# Altium PCB digital_measurer.PcbDoc
Units mm, origin at the board's own origin, x right, y up, seen from the top; angles counter-clockwise.
Board outline 26.48 x 31.15 mm, 2 copper layers (Top Layer, Bottom Layer); 25 components, 15 nets, 93 pads, 20 vias.
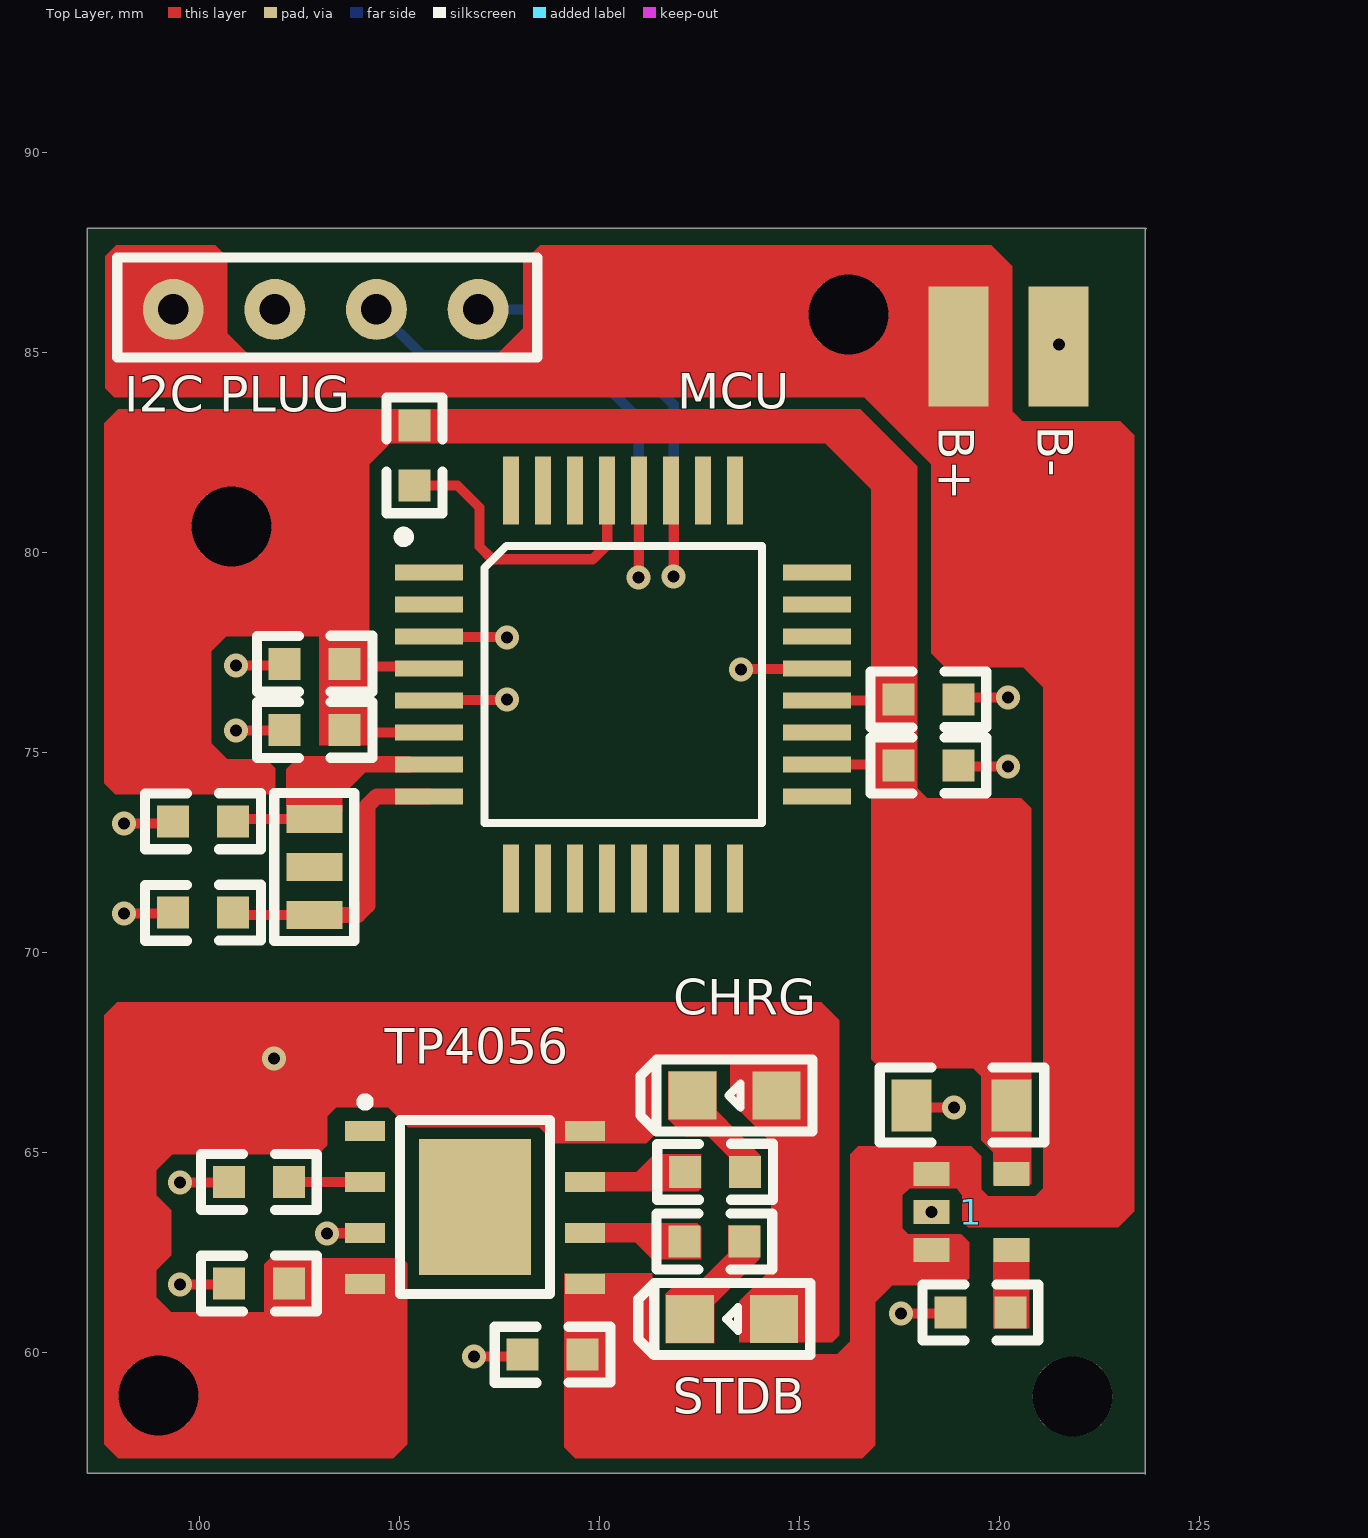
[diagram p0: Top Layer view]
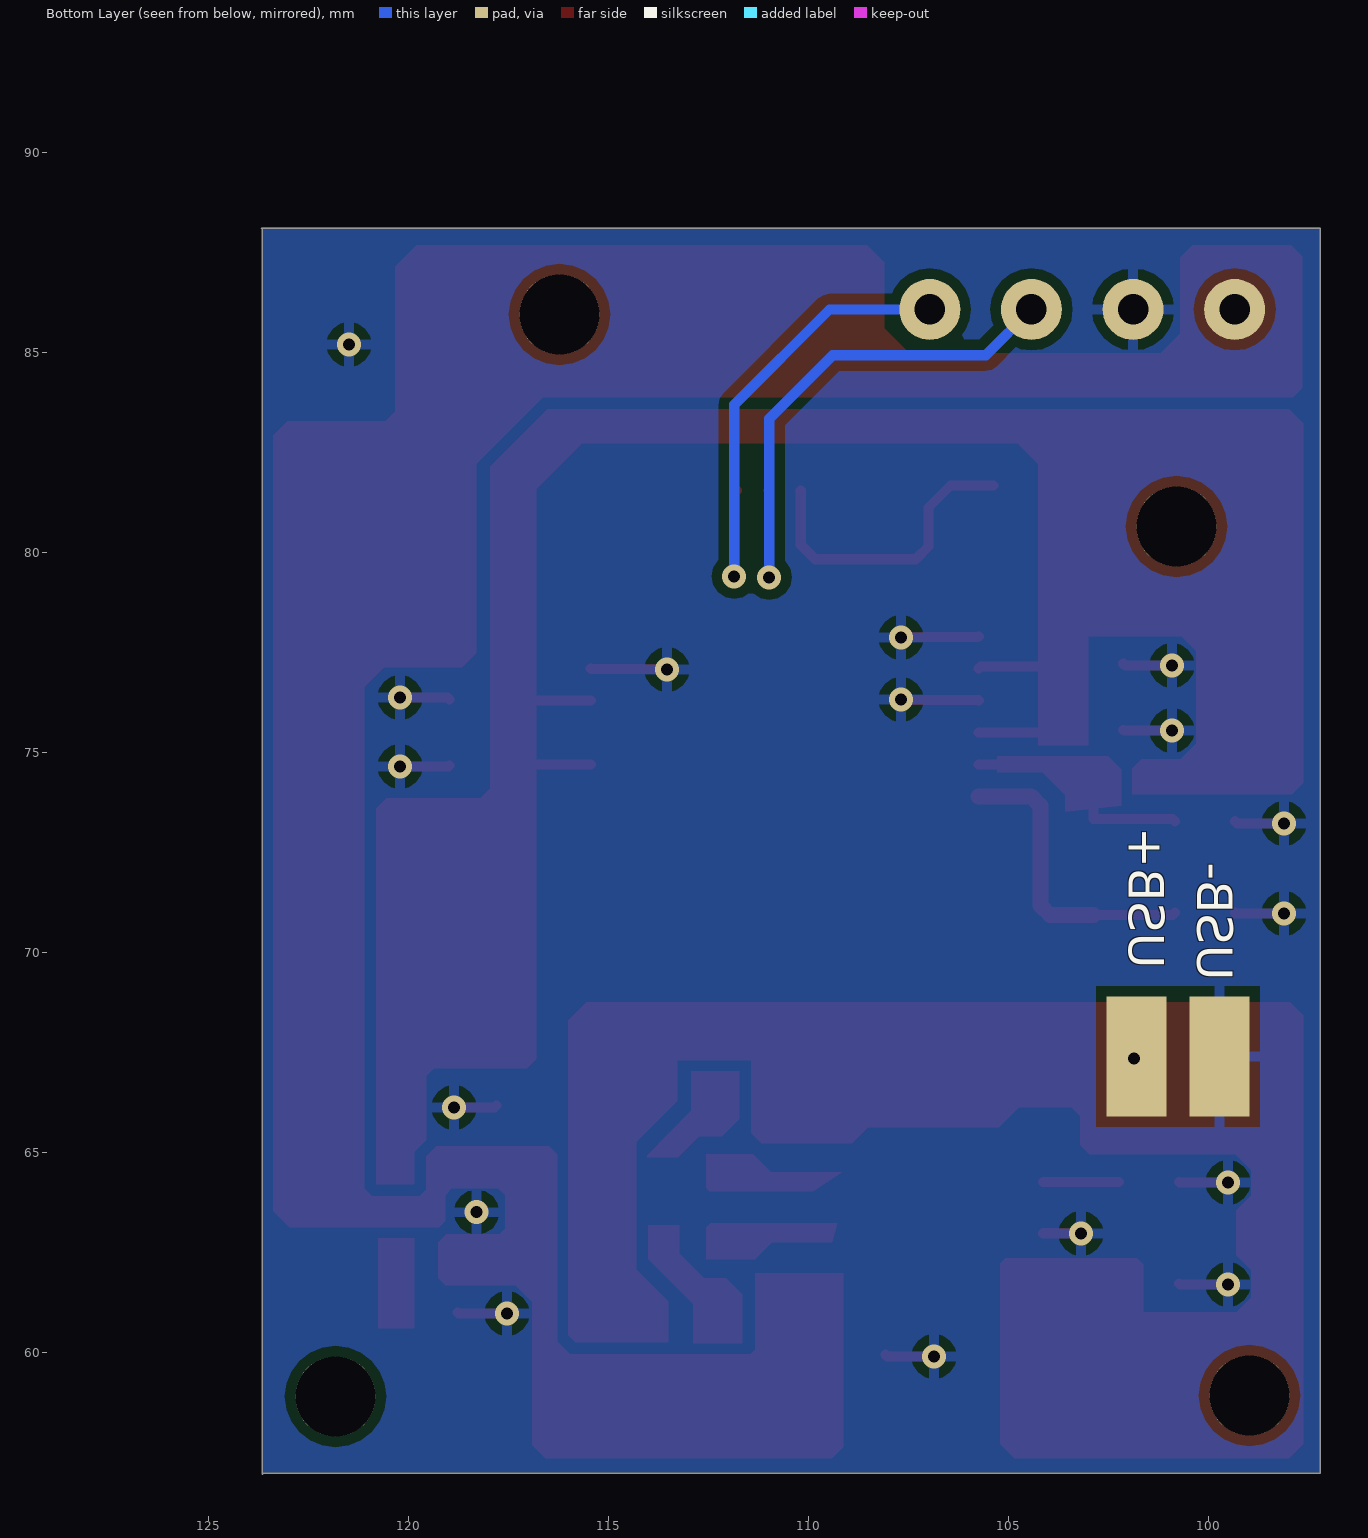
[diagram p1: Bottom Layer view, seen from below]
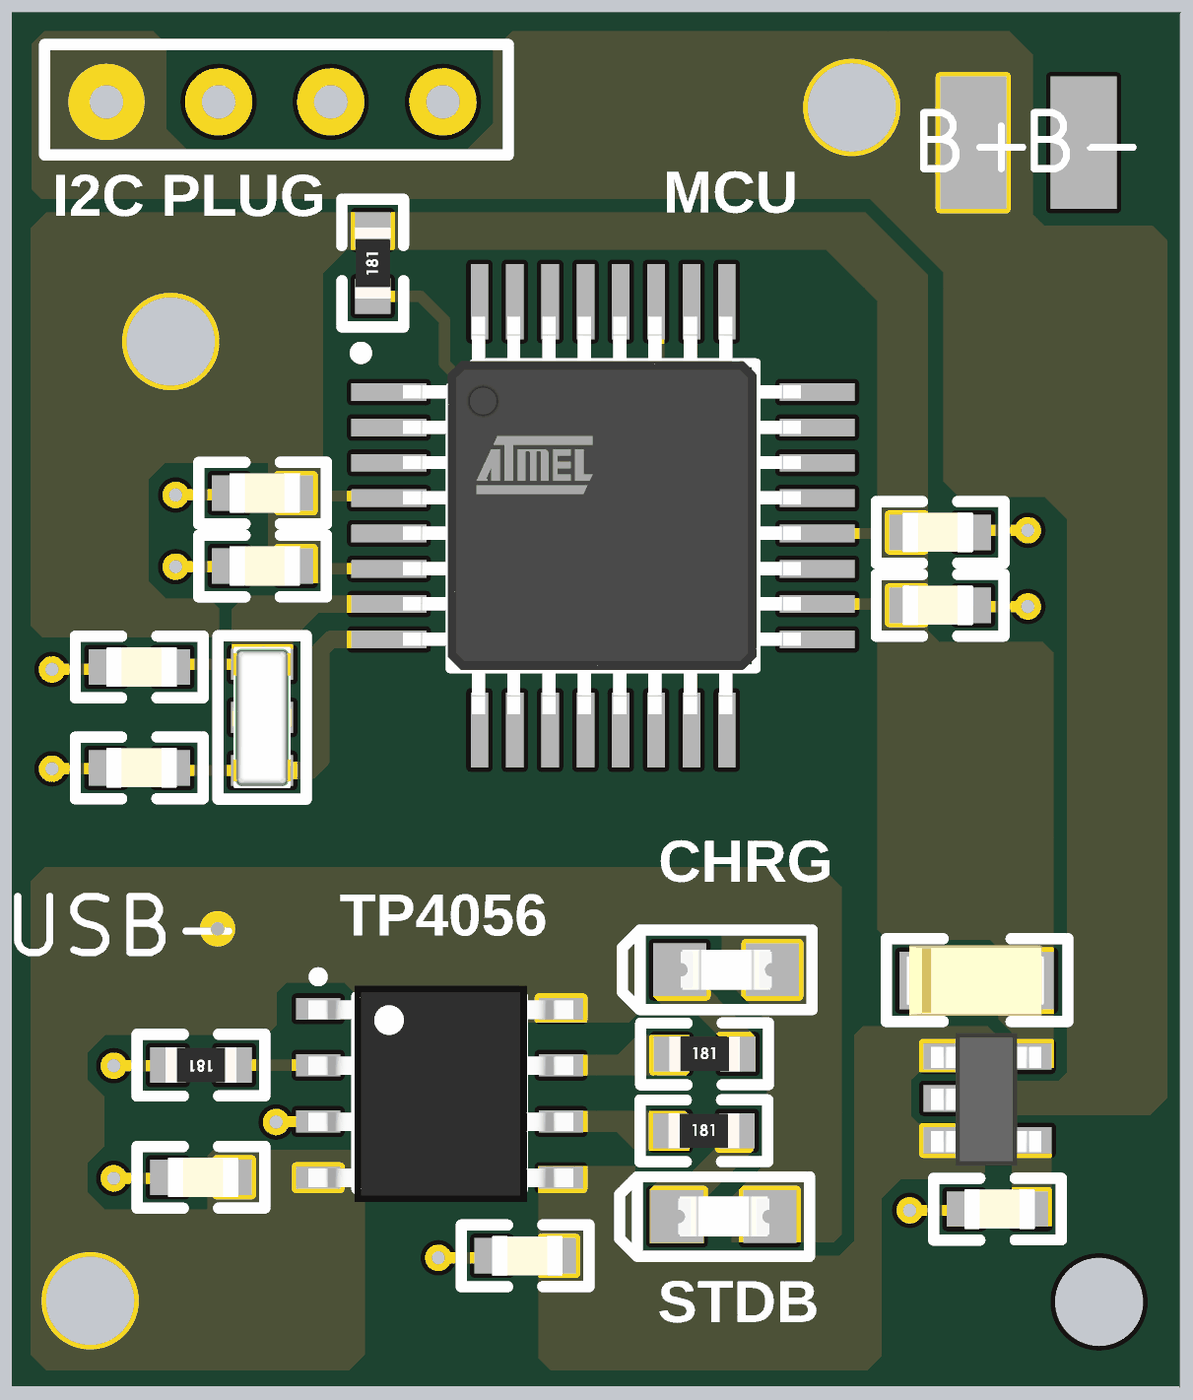
[diagram p2: 3D render of the assembled board from above, using the file's embedded part models]

## Layer stack, top to bottom
Top Solder: solder mask 0.0102, Solder Resist, Dk 3.5
Top Layer: signal copper 0.0356
Dielectric 1: dielectric 0.32, FR-4, Dk 4.8
Bottom Layer: signal copper 0.0356
Bottom Solder: solder mask 0.0102, Solder Resist, Dk 3.5

## Board outline
97.2,56.975 97.2,88.1 123.675,88.1 123.65,88.075 123.65,56.95 123.625,56.975

## Design rules (kind name [scope] priority, off if disabled: settings)
Clearance [All] p1: gap=0.254 ignorepadtopadclearanceinfootprint=TRUE except(0: Arc-Hole Track-Hole SMDPad-Hole THPad-Hole Via-Hole Fill-Hole Poly-Hole Region-Hole Text-Hole)
PolygonConnect [All] p1: connectstyle=Relief reliefconductorwidth=0.254 reliefentries=4 polygonreliefangle="90 Angle" airgapwidth=0.254
RoutingVias [All] p1: holewidth=0.711 width=1.27 viastyle="Through Hole" minholewidth=0.711 minwidth=1.27 maxholewidth=0.711 maxwidth=1.27
SolderMaskExpansion [All] p1: expansion=0.102 istentingtop=FALSE
Width [All] p1 off: maxlimit=0.254 minlimit=0.254 preferedwidth=0.254
30 further rules are at their usual default settings.

## Classes and differential pairs
component class digital_measurer: B+ B- U? USB+ USB-

## Components (designator, comment, footprint, x,y, rotation, side; value= is the part's Value field where it differs from the comment)
1 "3.3v reg" "3.3v reg" 118.297,64.459 r270 top
B+ "PAD" PAD#1 118.975,85.15 r0 top
B- "PAD" PAD#1 121.475,85.15 r0 top
C1 "0603 CAP" "0603 CAP" 100.735,61.722 r0 top
C2 "0603 CAP" "0603 CAP" 108.077,59.944 r0 top
C3 "0603 CAP" "0603 CAP" 102.132,75.565 r0 top
C4 "0603 CAP" "0603 CAP" 102.132,77.216 r0 top
C5 "0603 CAP" "0603 CAP" 118.975,76.327 r180 top
C6 "0603 CAP" "0603 CAP" 118.975,74.676 r180 top
C7 "2.2uF TAN CAP" "2.2uF TAN CAP" 117.8,66.175 r0 top
C8 "0603 CAP" "0603 CAP" 118.775,61 r0 top
C9 "0603 CAP" "0603 CAP" 99.338,73.279 r0 top
C10 "0603 CAP" "0603 CAP" 99.338,70.993 r0 top
CHRG "SMD_0805_LED" 0805_LED 114.427,66.421 r180 top (schematic designator LED1)
"I2C PLUG" "VL53L0X" VL53L0x 99.345,86.075 r0 top (schematic designator VL1)
MCU "atmega328p" atmega328p 105.743,79.502 r0 top (schematic designator U1)
R2 "0603 RES" "0603 RES" 113.641,64.516 r180 top
R3 "0603 RES" "0603 RES" 113.625,62.775 r180 top
R4 "0603 RES" "0603 RES" 100.735,64.262 r0 top
R5 "0603 RES" "0603 RES" 105.375,83.175 r270 top
STDB "SMD_0805_LED" 0805_LED 114.368,60.833 r180 top (schematic designator LED2)
TP4056 "tp4056" tp4056 106.965,63.662 r0 top (schematic designator SOP1)
USB+ "PAD" PAD#2 101.8,67.4 r0 top
USB- "PAD" PAD#2 99.725,67.4 r0 top
X1 "smd crystal" "smd crystal" 102.87,70.936 r90 top

## Footprints (in the part's own frame and the unit in brackets; to place one, negate y for a bottom-side part, rotate by r counter-clockwise, add the part's x,y. Pads: shape width x height; smd on the part's side, far side on the other; paste and mask are expansions set on the pad)
"2.2uF TAN CAP" [mm]
  rect 1x1.3 smd: 1(0,0) 2(2.5,0)
  silkscreen extent -0.79,-0.93 3.32,0.95, body extent -0.33,-0.8 2.77,0.8, height 1.31
"3.3v reg" [mm]
  rect 0.6x0.9 smd: 1(0,0) 2(0.95,0) 3(1.9,0) 4(1.9,2) 5(0,2)
  body extent -0.52,-0.27 2.48,2.23, height 1.1
"0603 CAP" [mm]
  rect 0.8x0.8 smd: 1(0,0) 2(1.5,0)
  silkscreen extent -0.7,-0.7 2.2,0.7, body extent 0,-0.45 1.6,0.45, height 0.8
"0603 RES" [mm]
  rect 0.8x0.8 smd: 1(0,0) 2(1.5,0)
  silkscreen extent -0.7,-0.7 2.2,0.7, body extent -0.05,-0.4 1.55,0.4, height 0.45
0805_LED [mm]
  rect 1.2x1.2 smd: 1(0,0) 2(2.1,0)
  silkscreen extent -0.9,-0.9 3.4,0.9, body extent 0.01,-0.45 2.07,0.45, height 0.85
atmega328p [mm]
  rect 1.7x0.4 smd: 1(0,0) 2(0,-0.8) 3(0,-1.6) 4(0,-2.4) 5(0,-3.2) 6(0,-4) 7(0,-4.8) 8(0,-5.6) 17(9.7,-5.6) 18(9.7,-4.8) 19(9.7,-4) 20(9.7,-3.2) 21(9.7,-2.4) 22(9.7,-1.6) 23(9.7,-0.8) 24(9.7,0)
  rect 0.4x1.7 smd: 9(2.05,-7.65) 10(2.85,-7.65) 11(3.65,-7.65) 12(4.45,-7.65) 13(5.25,-7.65) 14(6.05,-7.65) 15(6.85,-7.65) 16(7.65,-7.65) 25(7.65,2.05) 26(6.85,2.05) 27(6.05,2.05) 28(5.25,2.05) 29(4.45,2.05) 30(3.65,2.05) 31(2.85,2.05) 32(2.05,2.05)
  silkscreen extent -0.76,-6.27 8.32,1.02, body extent 0.32,-7.3 9.33,1.71, height 1.15
PAD#1 [mm]
  rect 1.5x3 smd: 1(0,0)
PAD#2 [mm]
  rect 1.5x3 smd far side: 1(0,0)
"smd crystal" [mm]
  rect 0.7x1.4 smd: 1(0,0) 2(1.2,0) 3(2.4,0)
  silkscreen extent -0.65,-1 3.05,1, body extent -0.4,-0.66 2.8,0.66, height 0.7
tp4056 [mm]
  rect 1x0.5 smd: 1(-2.825,1.875) 2(-2.825,0.6) 3(-2.825,-0.675) 4(-2.825,-1.95) 5(2.675,-1.95) 6(2.675,-0.675) 7(2.675,0.6) 8(2.675,1.875)
  rect 2.8x3.4 smd: 9(-0.075,-0.025)
  silkscreen extent -2.91,-2.2 1.8,2.69, body extent -3.05,-2.5 2.95,2.4, height 1.75
VL53L0x [mil]
  round 60 hole 30: 1(0,0) 2(100,0) 3(200,0) 4(300,0)
  silkscreen extent -55,-47 358,51

## Free pads (board coordinates)
  round 2 hole 2 unplated: 3(98.975,58.925) 3(100.8,80.65) 3(116.225,85.95) 3(121.825,58.9)

## Via types
v1: diameter 0.6, hole 0.3, Top Layer to Bottom Layer, 20 vias

## Nets (pads, with @x,y where several pads share a name; then routed paths per layer and width w, separated by ;. In a path a pad name is that pad's centre, name@x,y a point inside that pad or via, vN(x,y) a via of type N, cw(c..) or ccw(c..) an arc to the next point about the centre after c; other vN are vias at no path point)
Net1_1: 1.1 1.3 "I2C PLUG.1" B+.1 C2.2 pad.3@116.225,85.95 TP4056.5 | length 63.3
  Top Layer w0.254: 99.345,86.075 99.345,84.88 99.95,84.275 109.463,84.275 110.338,85.15 B+.1 118.9,85.075 118.9,79.875 121.275,77.5 121.275,64 121.053,63.778 119.689,63.778 ; C2.2 109.625,59.896 109.625,59 110,58.625 115.525,58.625 116.6,59.7 116.6,62.559 ; 1.3 116.6,62.559 ; 1.1@118.297,64.475 119.1,64.475 117.075,64.475 116.6,64 116.6,62.559
Net1_2: 1.2 "I2C PLUG.2" B-.1 C1.1 C2.1 C3.1 C4.1 C5.1 C6.1 C7.1 C8.1 C9.1 C10.1 MCU.3 MCU.5 MCU.21 R4.1 TP4056.3 USB-.1 | length 20.3
  Top Layer w0.254: v1(98.111,70.974) 99.319,70.974 C10.1 ; v1(98.111,73.224) 99.283,73.224 C9.1 ; v1(99.511,61.699) 100.712,61.699 C1.1 ; v1(99.511,64.249) 100.722,64.249 R4.1 ; v1(100.911,75.549) 102.116,75.549 C3.1 ; v1(100.911,77.174) 102.09,77.174 C4.1 ; v1(103.186,62.974) 103.193,62.98 104.133,62.98 TP4056.3 ; MCU.5 105.754,76.313 107.676,76.313 v1(107.686,76.324) ; MCU.3 105.757,77.888 107.672,77.888 v1(107.686,77.874) ; v1(106.861,59.899) 108.032,59.899 C2.1 ; v1(113.536,77.074) 113.551,77.088 115.429,77.088 MCU.21 ; v1(117.536,60.974) 118.749,60.974 C8.1 ; C7.1 117.851,66.124 v1(118.861,66.124) ; C6.1 119.002,74.649 v1(120.211,74.649) ; C5.1 119.022,76.374 v1(120.211,76.374)
  other v1: 118.297,63.509 121.486,85.199
Net1_4: 1.4 C8.2 | length 1.6
  Top Layer w0.254: C8.2 120.275,62.537 1.4
Net1_5: 1.5 C3.2 C4.2 C5.2 C6.2 C7.2 MCU.4 MCU.6 MCU.18 MCU.20 pad.3@100.8,80.65 R5.1 | length 48.5
  Top Layer w0.254: MCU.6 103.695,75.502 C3.2 C4.2 ; MCU.4 105.695,77.15 103.698,77.15 C4.2 ; MCU.18 C6.2@117.449,74.702 ; MCU.20 117.45,76.302 C5.2 ; 1.5 120.3,64.462 C7.2 120.3,68.25 117.4,71.15 117.4,74.653 C6.2@117.449,74.702 ; C4.2 103.6,77.248 103.6,81.9 105.02,83.32 105.4,83.32 116.13,83.32 117.475,81.975 C5.2 ; C6.2@117.449,74.702 117.475,74.728 C5.2
Net*_1: MCU.29 R5.2 | length 7.7
  Top Layer w0.254: R5.2 106.45,81.675 107,81.125 107,80.15 107.32,79.83 109.83,79.83 110.193,80.193 MCU.29
NetC1_2: C1.2 CHRG.1 pad.3@98.975,58.925 STDB.1 TP4056.4 TP4056.8 USB+.1 | length 45.1
  Top Layer w0.254: C1.2 102.245,61.712 TP4056.4 104.14,60.54 103.675,60.075 99.2,60.075 98.45,60.825 98.45,67.1 99.295,67.945 109.625,67.945 ; TP4056.8 109.625,65.552 109.625,67.945 ; STDB.1 114.376,60.825 115.425,60.825 115.75,61.15 115.75,63.611 115.756,63.617 115.756,63.933 115.75,63.939 115.75,66.375 ; CHRG.1 115.704,66.421 115.75,66.375 ; 109.625,67.945 115.38,67.945 115.75,67.575 115.75,66.375
  other v1: 101.861,67.349
NetC9_2: C9.2 MCU.7 X1.3 | length 6.2
  Top Layer w0.254: C9.2 100.895,73.336 X1.3 102.87,74.47 103.102,74.702 MCU.7
NetC10_2: C10.2 MCU.8 X1.1 | length 7.6
  Top Layer w0.254: C10.2 100.895,70.936 X1.1
  Top Layer w0.4: X1.1 103.961,70.936 104.2,71.175 104.2,73.668 104.434,73.902 MCU.8
NetLED1_2: CHRG.2 R2.1
NetLED2_2: R3.1 STDB.2
NetR2_2: R2.2 TP4056.7
NetR3_2: R3.2 TP4056.6
NetR4_2: R4.2 TP4056.2 | length 1.9
  Top Layer w0.254: R4.2 TP4056.2
NetU1_27: "I2C PLUG.4" MCU.27 | length 12.3
  Top Layer w0.254: MCU.27 111.855,81.49 v1(111.855,79.404)
  Bottom Layer w0.254: 106.965,86.075 109.475,86.075 111.855,83.695 v1(111.855,79.404)
NetU1_28: "I2C PLUG.3" MCU.28 | length 13.8
  Top Layer w0.254: v1(110.98,79.379) 110.987,79.385 110.987,81.546 MCU.28
  Bottom Layer w0.254: 104.425,86.075 105.568,84.932 109.393,84.932 110.98,83.345 v1(110.98,79.379)
pads on no net: MCU.1 MCU.2 MCU.9 MCU.10 MCU.11 MCU.12 MCU.13 MCU.14 MCU.15 MCU.16 MCU.17 MCU.19 MCU.22 MCU.23 MCU.24 MCU.25 MCU.26 MCU.30 MCU.31 MCU.32 TP4056.1 TP4056.9 X1.2

## Polygon pours and split planes (outlines as drawn)
Net1_2 on Bottom Layer "NONET_L-01_P-001" (solid, pour order 1): 97.2,88.125 123.65,88.125 123.65,57 97.2,57

## Other copper
Top Layer:
  region net Net1_5: 119.85,64.2 120.8,64.2 120.8,73.6 120.55,73.85 118.2,73.85 117.95,74.1 117.95,82.15 116.525,83.575 104.657,83.575 97.975,83.575 97.625,83.225 97.625,74.225 97.9,73.95 101.9,73.95 101.9,74.6 101.675,74.825 100.7,74.825 100.3,75.225 100.3,77.525 100.675,77.9 103,77.9 103,75.175 104.25,75.175 104.25,82.2 104.775,82.725 115.65,82.725 116.8,81.575 116.8,67.325 117.025,67.1 119.35,67.1 119.55,66.9 119.55,65.3 119.85,65
  region: 102.975,77.625
  region net NetC1_2: 113.5,60.25 115.825,60.25 116,60.425 116,68.3 115.55,68.75 97.95,68.75 97.625,68.425 97.625,57.7 97.975,57.35 104.85,57.35 105.2,57.7 105.2,62.225 105.075,62.35 101.775,62.35 101.625,62.2 101.625,61 99.3,61 98.925,61.375 98.925,62.05 99.3,62.425 99.3,63.55 98.925,63.925 98.925,64.55 99.325,64.95 102.975,64.95 103.2,65.175 103.2,65.9 103.425,66.125 104.725,66.125 105.225,65.625 108.5,65.625 108.9,65.225 111.175,65.225 111.425,65.475 111.425,67.275 111.45,67.3 113.275,67.3 113.275,66.275 114.3,65.25 114.3,62.075 113.5,61.275
  region net Net1_1: 97.65,84.1 97.875,83.875 116.625,83.875 118.3,82.2 118.3,77.475 118.65,77.125 120.6,77.125 121.1,76.625 121.1,64.1 120.9,63.9 119.725,63.9 119.55,64.075 119.55,64.9 119.3,65.15 116.475,65.15 116.275,64.95 116.275,60.275 115.95,59.95 111.45,59.95 111.325,60.075 111.325,61.975 109.125,61.975 109.125,57.625 109.4,57.35 116.575,57.35 116.9,57.675 116.9,61.25 117.325,61.675 119.075,61.675 119.25,61.85 119.25,62.75 119.05,62.95 117.725,62.95 117.575,63.1 117.575,63.934 117.763,64.1 118.934,64.1 119.686,63.125 122.975,63.125 123.375,63.525 123.375,82.925 123.025,83.275 120.575,83.275 120.325,83.525 120.325,87.15 119.8,87.675 108.525,87.675 108.1,87.25 108.1,85.6 107.475,84.975 101.2,84.975 100.7,85.475 100.7,87.375 100.4,87.675 97.925,87.675 97.65,87.4
  region: 128.025,92.175
  region net Net1_5: 119.85,66.45 120.75,66.45 120.75,64.2 119.85,64.2
  region net Net1_4: 119.85,62.85 120.75,62.85 120.75,60.6 119.85,60.6
  region net Net1_1: 118.934,64.1 119.075,63.959 119.075,63.275 119.225,63.125 119.686,63.125
  region net NetC9_2: 102.175,73.672 102.175,74.575 102.5,74.9 105.275,74.9 105.275,74.5 104.15,74.5 103.575,73.925 103.575,73.522
  region: 113.775,60.225
  region net NetLED2_2: 114,63.175 114,62.325 112.875,61.2 112.875,60.225 111.65,60.225 111.65,61.45 112.05,61.85 112.6,61.85 113.225,62.475 113.225,63.175
  region net NetLED2_2: 114,63.175
  region net NetLED2_2: 114,63.175
  region net NetLED2_2: 114.031,63.206
  region net Net1_1: 109.125,61.975 109.125,59.525 109.175,59.475 110.025,59.475 110.025,61.1 110.175,61.25 110.175,61.975
  region: 115.375,63.775
  region net NetLED1_2: 111.725,67.025 111.725,65.825 112.15,65.4 112.725,65.4 113.25,64.875 114.025,64.875 114.025,64.925 112.925,66.05 112.925,67.025
  region net NetR3_2: 109.275,63.225 112.45,63.225 112.55,63.125 112.55,62.325 111.325,62.325 110.9,62.75 109.4,62.75
  region net NetR2_2: 109.15,64.5 110.925,64.5 111.375,64.95 112.55,64.95 112.55,64.1 112.475,64.025 109.875,64.025

## Silkscreen, mask and mechanical layers (free items; w line width, h text height)
Mechanical 1:
  lines w0.254: 97.2,56.975 123.625,56.975 123.65,56.975 123.65,88.075 123.65,88.1 97.2,88.1 97.2,56.975